# Altium PCB flatsat_2_PCB.PcbDoc (part 4 of 6)
Units mil, origin at the board's own origin, x right, y up, seen from the top; angles counter-clockwise.
Board outline 15748.03 x 9842.52 mil, 4 copper layers (Top Layer, FlatSat GND, FlatSat VCC, Bottom Layer), stack 82.765 mil thick; 155 components, 191 nets, 1391 pads, 1634 vias.
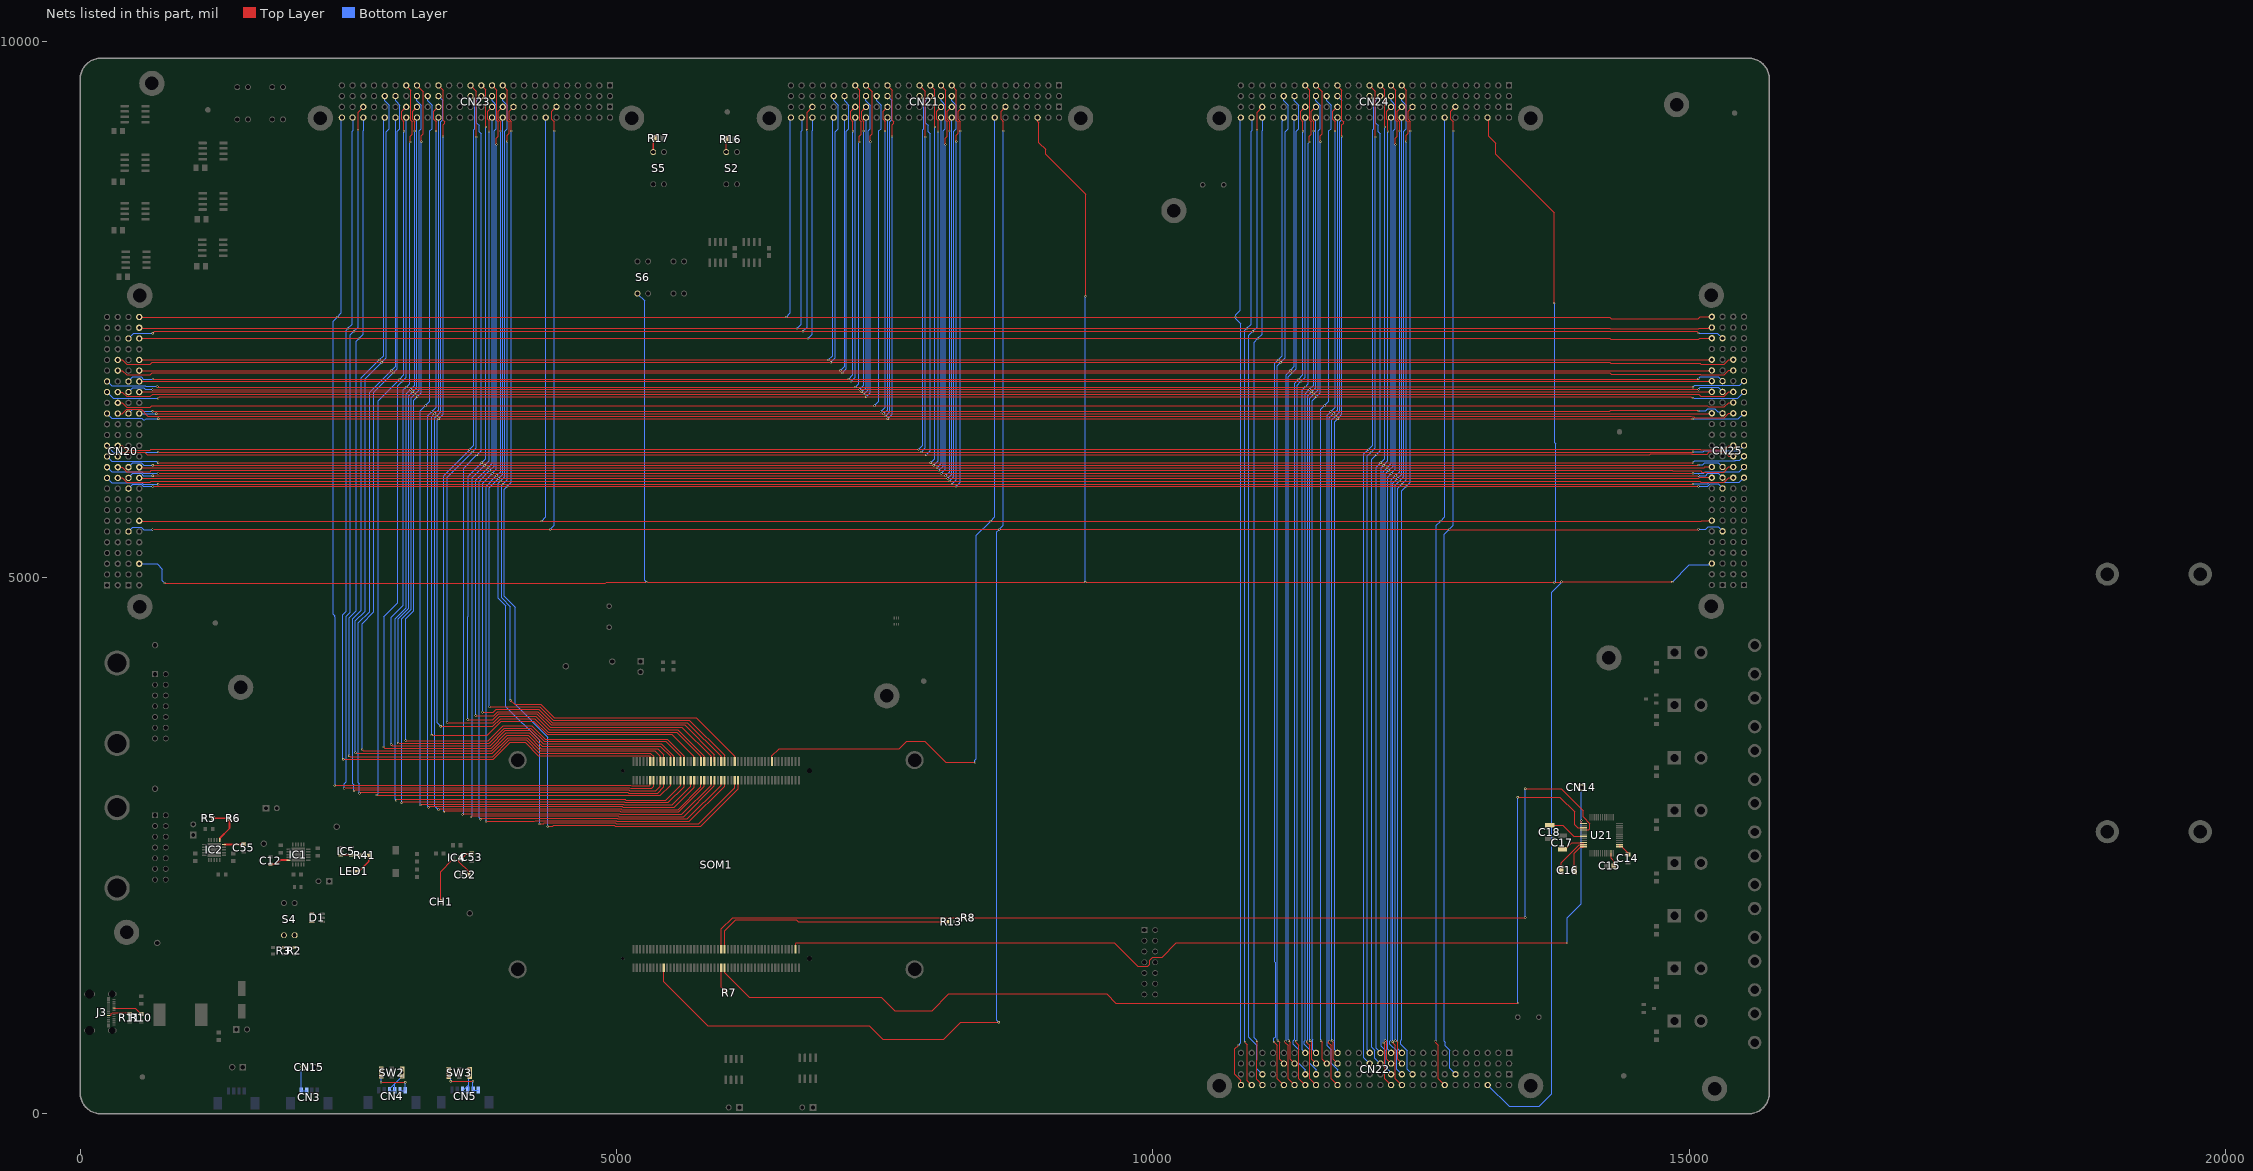
[diagram p5: the nets of this part, all layers, seen from the top]

## Via types
v1: diameter 20, hole 11.81, Top Layer to Bottom Layer, tented both sides, 872 vias
v2: diameter 30, hole 15, Top Layer to Bottom Layer, 690 vias
v3: diameter 30, hole 17.72, Top Layer to Bottom Layer, tented both sides, 72 vias

## Nets (pads, with @x,y where several pads share a name; then routed paths per layer and width w, separated by ;. In a path a pad name is that pad's centre, name@x,y a point inside that pad or via, vN(x,y) a via of type N, cw(c..) or ccw(c..) an arc to the next point about the centre after c; other vN are vias at no path point) (continued)
H2_P: CN20.58 CN21.58 CN22.58 CN24.58 CN25.58 S6.1 | length 32268.2
  Top Layer w8: v1(787.4,4949.26) 2866.44,4949.26 2869.41,4946.28 4895.99,4946.28 4907.08,4957.37 v1(5281.03,4957.37) v1(9370.08,4957.37) 9370.98,4956.47 13741.45,4956.47 v1(13742.36,4955.56) 13800.74,4955.56 13805.81,4960.63 v1(13809.06,4960.63) 13810.68,4959 14840.25,4959 v1(14841.88,4957.37) ; CN21.58@8925.98,9288.19 8927.79,9286.39 8927.79,9251.35 8937.01,9242.13 8937.01,9055.12 9000.33,8991.8 9000.33,8948.66 9011.98,8937.01 9373.57,8575.42 v1(9373.57,7622.05) ; CN24.58@13120.47,9288.19 13129.92,9278.74 13129.92,9114.17 13194.82,9049.28 13194.82,8948.66 13740.16,8403.32 v1(13740.16,7559.06)
  Bottom Layer w7.99: CN22.58@13121.59,269.42 13321.08,69.93 13603.39,69.93 13641.73,108.27
  Bottom Layer w8: CN20.58@551.18,5129.13 717.32,5129.13 767.72,5078.74 767.72,4969.63 787.4,4949.94 v1(787.4,4949.26) ; S6.1@5195.28,7647.64 5261.59,7581.32 5261.59,4976.81 v1(5281.03,4957.37) ; v1(9370.08,4957.37) 9371.83,4959.12 9371.83,7620.3 v1(9373.57,7622.05) ; 13641.73,108.27 13641.73,109.64 13718.79,186.7 13718.79,4861.88 13806.76,4949.85 13806.76,4958.33 v1(13809.06,4960.63) ; v1(13740.16,7559.06) 13740.16,7555.81 13745.16,7550.81 13745.16,6257.49 13756.16,6246.49 13756.16,4966.25 13745.47,4955.56 v1(13742.36,4955.56) ; v1(14841.88,4957.37) 15002.62,5118.11 15184.23,5118.11 15197.41,5131.3 CN25.58@15211.23,5131.3
LTC_ITR: CN14.1 SOM1.JX2-97 U21.37 | length 8989.9
  Top Layer w7.99: SOM1.JX2-97@6669.29,1535.43 6669.29,1586.61 6677.17,1594.49 9641.73,1594.49 9860.02,1376.2 9905.53,1376.2 9936.99,1376.2 9951,1376.2 9972.44,1397.64 9972.44,1433.07 10000,1460.63 10086.61,1460.63 10220.47,1594.49 v1(13862.2,1594.49) ; U21.37@13993.35,2706.69 13994.15,2706.69 13996.06,2708.6 v1(13996.06,2736.22)
  Bottom Layer w7.99: CN14.1@13992.13,3047.24 CN14.1@13996.06,3043.31 v1(13996.06,2736.22)
  Bottom Layer w8: v1(13862.2,1594.49) 13862.2,1826.77 13996.06,1960.63 v1(13996.06,2736.22)
MISO_CHN_1: CN20.37 CN21.37 CN22.37 CN23.37 CN24.37 CN25.37 SOM1.JX1-31 | length 36391.1
  Top Layer w8: v1(727.5,6670.61) 742.14,6685.25 v1(3141.9,6685.25) v1(7327.72,6685.25) v1(11522.21,6685.25) 15015.02,6685.25 15027.5,6672.77 v1(15034.91,6672.77) v1@15032.75,6670.61 ; v1(3035.43,3480.32) 3036.76,3478.99 3421.45,3478.99 3423.23,3477.2 3804.67,3477.2 3946.35,3618.88 4211.91,3618.88 4336.8,3494 5472.54,3494 5629.92,3336.61 SOM1.JX1-31@5629.92,3285.43 ; CN23.37@3140.16,9588.19 3198.69,9529.66 3198.69,9136.34 3181.27,9118.92 v1(3181.27,9062.82) ; CN21.37@7325.98,9588.19 7384.51,9529.66 7384.51,9136.34 7367.09,9118.92 v1(7367.09,9062.82) ; CN24.37@11520.47,9588.19 11579,9529.66 11579,9136.34 11561.58,9118.92 v1(11561.58,9062.82)
  Bottom Layer w8: CN20.37@251.18,6729.13 309.71,6670.61 v1(727.5,6670.61) ; v1(3035.43,3480.32) 3035.43,4618.11 3110.24,4692.91 3110.24,6653.59 v1(3141.9,6685.25) 3181.27,6724.62 v1(3181.27,9062.82) ; v1(7327.72,6685.25) 7367.09,6724.62 v1(7367.09,9062.82) ; CN22.37@11521.59,569.42 11490.75,600.26 11490.75,691.2 11487.2,694.75 11487.2,1417.32 11487.2,6650.23 v1(11522.21,6685.25) 11561.58,6724.62 v1(11561.58,9062.82) ; v1(15034.91,6672.77) 15452.7,6672.77 CN25.37@15511.23,6731.3
MISO_CHN_2: CN20.66 CN21.66 CN22.66 CN23.66 CN24.66 CN25.66 SOM1.JX1-83 | length 35698.8
  Top Layer w8: CN20.66@551.18,5529.13 553.11,5527.2 v1(4302.72,5527.2) v1(8488.54,5527.2) v1(12683.03,5527.2) 15113.82,5527.2 15118.7,5532.08 15210.44,5532.08 CN25.66@15211.23,5531.3 ; SOM1.JX1-83@6448.82,3285.43 6448.82,3338.58 6515.75,3405.51 7637.8,3405.51 7706.69,3474.41 7874.02,3474.41 8070.87,3277.56 v1(8343.84,3277.56) ; v1(12636.11,678.55) 12636.11,664.13 12662.12,638.12 12662.12,328.88 CN22.66@12721.59,269.42
  Bottom Layer w8: v1(4302.72,5527.2) 4342.09,5566.57 CN23.66@4342.09,9286.26 ; v1(8343.84,3277.56) 8342.2,3279.2 8342.2,3299.3 8354.33,3311.43 8354.33,5392.99 v1(8488.54,5527.2) 8527.91,5566.57 CN21.66@8527.91,9286.26 ; v1(12636.11,678.55) 12636.11,681.59 12643.76,689.24 12643.76,5487.93 v1(12683.03,5527.2) 12722.4,5566.57 CN24.66@12722.4,9286.26
MISO_CHN_3: SOM1.JX2-56 U21.39 | length 10412.6
  Top Layer w7.99: 9655.51,1033.46 v1(13405.51,1033.46) ; v1@13403.54,2952.76 13795.28,2952.76 13933.07,2814.96 13933.07,2696.85 13962.6,2667.32 U21.39@14015.75,2667.32
  Top Layer w8: SOM1.JX2-56@6007.87,1362.2 6007.87,1314.7 6236.2,1086.37 7467.84,1086.37 7593.19,961.02 7942.3,961.02 8099.78,1118.5 9570.47,1118.5 9655.51,1033.46
  Bottom Layer w7.99: v1(13401.57,2952.76) 13403.54,2950.79 13403.54,1035.43 v1(13405.51,1033.46)
MOSI_CHN_1: CN20.39 CN21.39 CN22.39 CN23.39 CN24.39 CN25.39 SOM1.JX1-25 | length 36342.7
  Top Layer w8: v1(718.5,6781.5) 721.75,6781.5 727.53,6775.72 v1(3039.73,6775.72) v1(7225.56,6775.72) v1(11420.05,6775.72) 11422.34,6778.01 11428.94,6778.01 11430.73,6779.81 15027.04,6779.81 15031.91,6774.93 v1(15035.16,6774.93) ; v1(2900.59,3442.97) 2901.25,3442.97 2911.28,3432.95 3822.67,3432.95 3964.58,3574.87 4193.68,3574.87 4318.57,3449.98 5418.13,3449.98 5535.36,3332.75 5535.36,3285.5 SOM1.JX1-25@5535.43,3285.43 ; CN23.39@3040.16,9588.19 3083.07,9545.28 3083.07,9264.54 3096.52,9251.09 3096.52,9133.18 3079.1,9115.76 v1(3079.1,9059.66) ; CN21.39@7225.98,9588.19 7268.9,9545.28 7268.9,9264.54 7282.35,9251.09 7282.35,9133.18 7264.93,9115.76 v1(7264.93,9059.66) ; CN24.39@11420.47,9588.19 11463.39,9545.28 11463.39,9264.54 11476.84,9251.09 11476.84,9133.18 11459.42,9115.76 v1(11459.42,9059.66)
  Bottom Layer w8: CN20.39@251.18,6829.13 294.09,6786.22 605.51,6786.22 610.24,6781.5 v1(718.5,6781.5) ; v1(2900.59,3442.97) 2900.59,4628.94 3013.96,4742.3 3013.96,6749.94 v1(3039.73,6775.72) 3070.87,6806.85 3070.87,9048.97 3079.1,9057.21 v1(3079.1,9059.66) ; v1(7225.56,6775.72) 7256.69,6806.85 7256.69,9048.97 7264.93,9057.21 v1(7264.93,9059.66) ; 11411.81,6767.48 11390.88,6746.55 11390.88,1417.32 11390.88,691.64 11390.59,691.36 11390.75,691.2 11390.75,600.26 CN22.39@11421.59,569.42 ; v1(11420.05,6775.72) 11451.18,6806.85 11451.18,9048.97 11459.42,9057.21 v1(11459.42,9059.66) ; v1(15035.16,6774.93) 15050.99,6790.76 15428.02,6790.76 15428.55,6791.29 15471.22,6791.29 CN25.39@15511.23,6831.3
MOSI_CHN_2: CN20.63 CN21.63 CN22.63 CN23.63 CN24.63 CN25.63 SOM1.JX2-20 | length 40153.4
  Top Layer w8: v1(676.09,5447.85) 677.75,5449.51 v1(4382.07,5449.51) v1(8567.9,5449.51) v1(12762.38,5449.51) 12764.2,5447.69 15076.76,5447.69 15076.95,5447.88 15085.15,5447.88 v1(15087.45,5450.18) ; v1@4421.51,9163.35 4421.51,9248.37 4398.82,9271.07 4398.82,9347.05 CN23.63@4440.16,9388.39 ; SOM1.JX2-20@5440.94,1362.2 5440.94,1232.29 5849.71,823.52 7357.21,823.52 7483.8,696.93 8051.69,696.93 8209.17,854.41 v1(8563.68,854.41) ; v1@8607.34,9163.35 8607.34,9248.37 8584.65,9271.07 8584.65,9347.05 CN21.63@8625.98,9388.39 ; v1@12801.83,9163.35 12801.83,9248.37 12779.13,9271.07 12779.13,9347.05 CN24.63@12820.47,9388.39
  Bottom Layer w8: CN20.63@450.98,5429.13 492.32,5470.47 568.3,5470.47 591,5447.78 676.02,5447.78 v1(676.09,5447.85) ; v1(4382.07,5449.51) 4421.44,5488.88 v1(4421.44,9163.28) v1@4421.51,9163.35 ; v1(8563.68,854.41) 8563.68,856.53 8547.24,872.97 8547.24,5425.61 8567.9,5446.26 v1(8567.9,5449.51) 8607.27,5488.88 v1(8607.27,9163.28) ; v1(12801.75,9163.28) 12801.75,5488.88 v1(12762.38,5449.51) 12716.54,5403.66 12716.54,676.9 12726.11,667.33 12726.11,634.3 12765.75,594.66 12765.75,425.45 CN22.63@12821.59,369.61 ; v1(15087.45,5450.18) 15154.9,5450.18 15177.36,5472.63 15270.09,5472.63 CN25.63@15311.42,5431.3
MOSI_CHN_3: R8.2 U21.40 | length 7218.6
  Top Layer w7.99: 9645.67,1830.71 v1(13472.44,1830.71) ; v1(13472.44,3031.5) 13807.09,3031.5 14011.81,2826.77 14011.81,2769.69 14074.8,2706.69 14074.8,2657.48 14065.82,2648.49 U21.40@14045.65,2648.49
  Top Layer w8: R8.2@8307.09,1830.71 R8.2@8307.56,1830.71 9645.67,1830.71
  Bottom Layer w8: v1(13472.44,1830.71) v1(13472.44,3031.5)
NC_KILL_SWITCH_1: CN4.1 CN4.2 SW2.1 | length 490.2
  Top Layer w10.98: v1(2805.12,295.28) v1(3031.5,295.28)
  Top Layer w15: SW2.1@2807.64,351.27 SW2.1@2807.64,385.72
  Bottom Layer w10.98: v1(2805.12,295.28) 2805.12,335.24 2809.71,339.84 2814.96,339.84 2820.07,344.95 2799.46,385.72 SW2.1@2807.64,385.72 ; CN4.2@2980.32,216.54 CN4.1@3023.09,216.54
  Bottom Layer w11: CN4.1@3031.5,221.46 v1(3031.5,295.28)
NC_KILL_SWITCH_2: CN5.1 CN5.2 SW3.1 | length 426
  Top Layer w10.98: v1(3454.97,304.87) v1@3661.17,304.87
  Top Layer w15: v1@3661.17,304.87 v1@3661.42,305.12
  Bottom Layer w10.98: SW3.1@3435.04,383.86 3435.04,351.93 3454.97,332 v1(3454.97,304.87)
  Bottom Layer w11: v1(3661.42,304.63) 3662.4,303.64 3662.4,223.43 CN5.2@3663.39,222.44 CN5.1@3712.6,222.44
NetC12_1: C12.1 IC1.15 | length 182.9
  Top Layer w15: C12.1@1775.59,2327.2 1831.14,2327.2 1871.06,2367.13 IC1.15@1941.93,2367.13
NetC14_1: C14.1 U21.13 U21.14 | length 142.3
  Top Layer w8: U21.13@14350.39,2490.16 14355.6,2490.16 14357.5,2492.06 14357.5,2507.94 14355.6,2509.84 U21.14@14350.39,2509.84 ; U21.13@14375.98,2490.16 14377.89,2488.25 14429.13,2437.01 C14.1@14429.13,2418.31 C14.1@14429.13,2401.57
NetC15_1: C15.1 U21.11 | length 119.3
  Top Layer w8: U21.11@14271.65,2431.1 14271.65,2381.89 14298.23,2355.31 C15.1@14298.23,2322.83
NetC16_1: C16.1 U21.48 | length 270.5
  Top Layer w8: C16.1@13927.17,2273.62 13927.17,2431.1 13984.32,2488.25 14013.84,2488.25 U21.48@14015.75,2490.16
NetC16_2: C16.2 U21.47 | length 354.7
  Top Layer w8: C16.2@13809.06,2263.78 13809.06,2342.52 13974.47,2507.94 14013.84,2507.94 U21.47@14015.75,2509.84
NetC17_1: C17.1 U21.46 | length 288.5
  Top Layer w7.99: C17.1@13824.56,2458.66 13789.37,2466.54 C17.1@13818.9,2466.54 13836.56,2484.19 13862.15,2484.19 13907.48,2529.53 U21.46@14015.75,2529.53
NetC18_1: C18.1 U21.43 | length 347.5
  Top Layer w8: C18.1@13710.63,2690.94 13820.87,2690.94 13923.23,2588.58 U21.43@14015.75,2588.58
NetC52_1: C52.1 IC4.1 | length 175.9
  Top Layer w9.84: IC4.1@3531.5,2367.68 3531.5,2352.36 3623.58,2260.28 C52.1@3623.58,2229.88
NetC53_1: C53.1 IC4.2 | length 134.4
  Top Layer w9.84: IC4.2@3533.46,2387.36 3568.46,2387.36 3604.74,2423.64 3648.48,2423.64 C53.1@3651.57,2426.73
NetC55_2: C55.2 IC2.15 | length 184.5
  Top Layer w15: IC2.15@1342.52,2511.81 1522.09,2511.81 C55.2@1525.59,2515.32
NetCH1_1: CH1.1 IC4.6 | length 440.6
  Top Layer w9.84: CH1.1@3361.67,1988.19 3361.67,1994.09 3361.67,2259.31 3470.04,2367.68 IC4.6@3486.22,2367.68
NetCN3_3: CN3.3 CN3.4 CN15.2 | length 280.4
  Bottom Layer w11: CN15.2@2085.14,436.22 2085.14,422.96 2062.01,399.83 CN3.4@2062.01,214.57 CN3.3@2111.22,214.57
NetD1_4: D1.4 R3.1 S4.3 | length 0.6
  Top Layer w15: R3.1@1897.24,1550.08 R3.1@1897.64,1549.68
NetD1_5: D1.5 R2.1 S4.4 | length 0.6
  Top Layer w15: R2.1@1996.06,1549.68 R2.1@1996.46,1550.08
NetIC2_16: IC2.16 R5.2 R6.1 | length 387
  Top Layer w15: R5.2@1235.79,2755.91 R6.1@1392.17,2755.91 ; IC2.16@1301.18,2553.15 1301.18,2570.87 1392.17,2661.85 R6.1@1392.17,2746.06
NetIC5_3: IC5.3 IC5.4 R41.1 | length 190.8
  Top Layer w15: IC5.3@2429.72,2412.4 IC5.4@2528.54,2412.4 2529.53,2411.42 2618.74,2411.42 R41.1@2619.72,2410.43
NetJ3_A5: J3.A5 R10.1 | length 276.5
  Top Layer w7.99: J3.A5@315.75,987.01 336.27,987.01 512.56,987.01 R10.1@568.9,930.67
NetJ3_B5: J3.B5 R11.1 | length 220.4
  Top Layer w7.99: J3.B5@264.57,918.11 265.43,918.98 284.79,918.98 290.13,924.31 290.13,937.58 297.43,944.88 442.24,944.88 ; 442.67,944.45 453.19,944.45 R11.1@462.6,935.04
NetLED1_2: LED1.2 R41.2 | length 196.8
  Top Layer w15: LED1.2@2587.8,2262.8 2599.61,2262.8 2689.72,2352.91 R41.2@2689.72,2410.43
NetR7_2: R7.2 SOM1.JX2-54 | length 249.7
  Top Layer w7.99: SOM1.JX2-54@5976.38,1362.2 5976.38,1182.6 6023.15,1135.83 R7.2@6023.15,1131.89
NetR8_1: R8.1 SOM1.JX2-53 | length 2504.2
  Top Layer w7.99: SOM1.JX2-53@5976.38,1535.43 5976.38,1724.41 6082.68,1830.71 R8.1@8247.56,1830.71
NetR13_1: R13.1 SOM1.JX2-55 | length 2302.7
  Top Layer w8: SOM1.JX2-55@6007.87,1535.43 6007.87,1706.69 6109.59,1808.41 6675.84,1808.41 6692.91,1791.34 R13.1@8090.08,1791.34
NetR16_2: R16.2 S2.4 | length 118.4
  Top Layer w8: R16.2@6022.99,9084.65 6023.62,9084.02 S2.4@6023.62,8966.54
NetR17_2: R17.2 S5.4 | length 132.4
  Top Layer w8: R17.2@5342.91,9083.7 R17.2@5353.7,9094.49
  Top Layer w15: S5.4@5342.91,8966.54 R17.2@5342.91,9083.7
NO_KILL_SWITCH_1: CN4.3 CN4.4 SW2.3 | length 264.9
  Bottom Layer w10.98: CN4.4@2883.86,214.68 CN4.3@2926.64,214.68 ; CN4.4@2886.92,234.36 2933.07,280.51 ; CN4.3@2933.07,221.11 2933.07,280.51 ; SW2.3@3001.97,349.41 2933.07,280.51
NO_KILL_SWITCH_2: CN5.3 CN5.4 SW3.3 | length 241.3
  Bottom Layer w10.98: CN5.4@3572.83,204.84 CN5.3@3615.61,204.84 ; CN5.4@3575.9,224.52 3622.05,270.67 ; CN5.3@3622.05,211.27 3622.05,270.67 ; SW3.3@3622.05,344.49 3622.05,270.67
P1: CN20.104 CN21.104 CN22.104 CN23.104 CN24.104 CN25.104 SOM1.JX1-12 | length 34920.6
  Top Layer w8: CN20.104@551.18,7429.13 1479.82,7429.13 1484.17,7424.78 2389.22,7424.78 2393.58,7429.13 v1(2396.83,7429.13) v1(6582.65,7429.13) v1(10771.65,7429.13) 14259.15,7429.13 14273.35,7414.94 15085.14,7414.94 15101.5,7431.3 CN25.104@15211.23,7431.3 ; v1(2374.02,3062.99) 2375.73,3064.7 5134.46,3064.7 5141.47,3057.7 5307.95,3057.7 5314.96,3064.7 SOM1.JX1-12@5314.96,3112.2 ; v1(10799.21,641.73) 10799.11,641.73 10763.78,606.4 10763.78,369.9 10821.59,312.09 CN22.104@10821.59,269.42
  Bottom Layer w8: v1(2374.02,3062.99) 2374.02,4633.03 2374.02,4643.56 2357.46,4660.12 2357.46,7389.76 v1(2396.83,7429.13) 2436.2,7468.5 2436.2,9284.23 CN23.104@2440.16,9288.19 ; v1(6582.65,7429.13) 6622.02,7468.5 6622.02,9284.23 CN21.104@6625.98,9288.19 ; v1(10799.21,641.73) 10819.64,662.16 10819.64,7365.4 10771.65,7413.39 v1(10771.65,7429.13) 10771.65,7448.82 10816.51,7493.68 10816.51,9284.23 CN24.104@10820.47,9288.19
P2: CN20.102 CN21.102 CN22.102 CN23.102 CN24.102 CN25.102 SOM1.JX1-11 | length 34784.8
  Top Layer w8: CN20.102@551.18,7329.13 557.35,7322.97 v1(2497.13,7322.97) v1(6682.96,7322.97) v1(10877.44,7322.97) 14259.15,7322.97 14263.85,7318.27 15087.64,7318.27 15095.73,7326.35 15206.29,7326.35 CN25.102@15211.23,7331.3 ; v1(2452.76,3307.09) 3852.42,3307.09 4010.16,3464.83 4148.1,3464.83 4272.99,3339.94 5307.95,3339.94 5314.96,3332.93 SOM1.JX1-11@5314.96,3285.43 ; v1(10858.27,669.29) 10881.05,646.51 10881.05,311.38 10921.59,270.84 CN22.102@10921.59,269.42
  Bottom Layer w8: v1@2452.89,3307.22 2450.46,3309.65 2450.46,3317.77 2450.46,4655.18 2480.32,4685.04 2480.32,7306.15 v1(2497.13,7322.97) 2536.5,7362.34 2536.5,9162.93 2545.1,9171.53 2545.1,9283.25 CN23.102@2540.16,9288.19 ; v1(6682.96,7322.97) 6722.33,7362.34 6722.33,9162.93 6730.93,9171.53 6730.93,9283.25 CN21.102@6725.98,9288.19 ; v1(10858.27,669.29) 10858.27,7303.79 v1(10877.44,7322.97) 10916.81,7362.34 10916.81,9162.93 10925.41,9171.53 10925.41,9283.25 CN24.102@10920.47,9288.19
P3: CN20.99 CN21.99 CN22.99 CN23.99 CN24.99 CN25.99 SOM1.JX1-14 | length 35557.5
  Top Layer w8: v1(676.84,7277.84) 695.19,7296.18 v1(2552.09,7296.18) v1(6737.91,7296.18) v1(10932.4,7296.18) 15069.39,7296.18 15084.49,7281.08 15084.49,7278.92 v1(15085.57,7280) ; v1(2461.32,3033.19) 2462.5,3033.19 2472.01,3042.7 5125.35,3042.7 5132.36,3035.69 5329,3035.69 5346.46,3053.15 SOM1.JX1-14@5346.46,3112.2 ; v1(2591.46,9171.24) 2591.46,9339.49 CN23.99@2640.16,9388.19 ; v1(6777.28,9171.24) 6777.28,9339.49 CN21.99@6825.98,9388.19 ; v1(10971.77,9171.24) 10971.77,9339.49 CN24.99@11020.47,9388.19
  Bottom Layer w8: CN20.99@451.18,7229.13 499.88,7277.84 v1(676.84,7277.84) ; v1(2461.32,3033.19) 2461.32,3079.43 2480.32,3098.43 2480.32,4637.8 2519.68,4677.17 2519.68,7263.78 v1(2552.09,7296.18) 2591.45,7335.55 v1(2591.46,9171.24) ; v1(6737.91,7296.18) 6777.28,7335.55 v1(6777.28,9171.24) ; v1(10971.77,9171.24) 10971.77,7335.55 v1(10932.4,7296.18) 10893.03,7256.81 10893.03,1417.32 10893.03,715.41 10967.88,640.56 10967.88,423.12 CN22.99@11021.59,369.42 ; v1(15085.57,7280) 15262.53,7280 CN25.99@15311.23,7231.3
P4: CN20.100 CN21.100 CN22.100 CN23.100 CN24.100 CN25.100 SOM1.JX1-13 | length 34864.4
  Top Layer w8: CN20.100@551.18,7229.13 v1(2600.01,7229.13) v1(6785.84,7229.13) v1(10980.32,7229.13) 14259.15,7229.13 14267.41,7220.87 15089.5,7220.87 15097.76,7229.13 15209.07,7229.13 CN25.100@15211.23,7231.3 ; v1(2507.87,3338.58) 2510.69,3338.58 2518.56,3330.71 3844.92,3330.71 4001.05,3486.83 4157.22,3486.83 4282.11,3361.95 5317.07,3361.95 5346.08,3332.93 5346.46,3332.93 SOM1.JX1-13@5346.46,3285.43 ; v1(10972.44,681.1) 10972.44,503.21 10967.44,498.21 10967.44,323.56 CN22.100@11021.59,269.42
  Bottom Layer w8: v1(2507.87,3338.58) 2507.87,4625.98 2573.06,4691.17 2573.06,7202.18 v1(2600.01,7229.13) 2639.38,7268.5 2639.38,9165.81 2645.1,9171.53 2645.1,9283.25 CN23.100@2640.16,9288.19 ; v1(6785.84,7229.13) 6825.21,7268.5 6825.21,9165.81 6830.93,9171.53 6830.93,9283.25 CN21.100@6825.98,9288.19 ; v1(10972.44,681.1) 10944.31,709.23 10944.31,1417.32 10944.31,7193.12 v1(10980.32,7229.13) 11019.69,7268.5 11019.69,9165.81 11025.41,9171.53 11025.41,9283.25 CN24.100@11020.47,9288.19
P5: CN20.96 CN21.96 CN22.96 CN23.96 CN24.96 CN25.96 SOM1.JX1-18 | length 35383.7
  Top Layer w8: CN20.96@551.18,7029.13 v1(2788.98,7029.13) v1(6974.81,7029.13) v1(11169.3,7029.13) 15209.07,7029.13 CN25.96@15211.23,7031.3 ; v1@2553.42,3012.14 2554.59,3012.14 2563.15,3020.69 5116.23,3020.69 5123.24,3013.68 5366.04,3013.68 5409.45,3057.09 SOM1.JX1-18@5409.45,3112.2 ; v1(11129.56,670.69) 11162.12,638.12 11162.12,328.88 CN22.96@11221.59,269.42
  Top Layer w15: v1(2552.46,3011.18) v1@2553.42,3012.14
  Bottom Layer w8: v1(2552.46,3011.18) 2552.46,3067.14 2539.37,3080.23 2539.37,4614.17 2620.77,4695.57 2620.77,6860.92 v1(2788.98,7029.13) 2828.35,7068.5 2828.35,9257.98 2830.39,9260.01 2830.39,9278.42 CN23.96@2840.16,9288.19 ; v1(6974.81,7029.13) 7014.18,7068.5 7014.18,9257.98 7016.22,9260.01 7016.22,9278.42 CN21.96@7025.98,9288.19 ; v1(11129.56,670.69) 11129.56,706.33 11143.6,720.37 11143.6,1412.52 11138.8,1417.32 11138.8,6998.63 v1(11169.3,7029.13) 11208.67,7068.5 11208.67,9257.98 11210.7,9260.01 11210.7,9278.42 CN24.96@11220.47,9288.19
P6: CN20.44 CN21.44 CN22.44 CN23.44 CN24.44 CN25.44 SOM1.JX1-17 | length 36030.5
  Top Layer w8: CN20.44@351.18,7029.13 393.86,7029.13 434.39,6988.6 653.68,6988.6 672.96,7007.87 v1(2812.47,7007.87) v1(6998.29,7007.87) v1(11192.78,7007.87) 14259.15,7007.87 14269.48,6997.55 15101.94,6997.55 15108.72,6990.76 15328.02,6990.76 15368.55,7031.3 CN25.44@15411.23,7031.3 ; v1(2566.93,3367.46) 2570.18,3367.46 2576.92,3360.72 3843.81,3360.72 3991.93,3508.84 4166.34,3508.84 4291.22,3383.96 5358.43,3383.96 5409.45,3332.93 SOM1.JX1-17@5409.45,3285.43 ; v1(11167.91,682.41) 11181.05,669.27 11181.05,549.03 11181.1,548.98 11181.1,511.81 11221.59,471.33 CN22.44@11221.59,469.42
  Bottom Layer w8: v1(2566.93,3367.46) 2566.93,4598.43 2656.82,4688.31 2656.82,6852.22 v1(2812.47,7007.87) 2851.84,7047.24 2851.84,9156.83 2880.69,9185.69 2880.69,9404.98 2840.16,9445.51 CN23.44@2840.16,9488.19 ; v1(6998.29,7007.87) 7037.66,7047.24 7037.66,9156.83 7066.52,9185.69 7066.52,9404.98 7025.98,9445.51 CN21.44@7025.98,9488.19 ; v1(11167.91,682.41) 11161.17,689.15 11161.17,1417.32 11161.17,6976.26 v1(11192.78,7007.87) 11232.15,7047.24 11232.15,9156.83 11261.01,9185.69 11261.01,9404.98 11220.47,9445.51 CN24.44@11220.47,9488.19
P7: CN20.94 CN21.94 CN22.94 CN23.94 CN24.94 CN25.94 SOM1.JX1-20 | length 35501.6
  Top Layer w8: CN20.94@551.18,6929.13 v1(2900.79,6929.13) v1(7086.61,6929.13) v1(11281.1,6929.13) 15209.07,6929.13 CN25.94@15211.23,6931.3 ; v1(2603.64,2989.71) 2605.36,2989.71 2614.33,2998.68 5107.12,2998.68 5114.12,2991.67 5383.41,2991.67 5440.94,3049.21 SOM1.JX1-20@5440.94,3112.2 ; v1(11236.11,678.55) 11236.11,664.13 11262.12,638.12 11262.12,328.88 CN22.94@11321.59,269.42
  Bottom Layer w8: v1(2603.64,2989.71) 2603.64,3077.46 2594.49,3086.61 2594.49,4578.74 2699.51,4683.76 2699.51,6727.86 v1(2900.79,6929.13) 2940.16,6968.5 CN23.94@2940.16,9288.19 ; v1(7086.61,6929.13) 7125.98,6968.5 CN21.94@7125.98,9288.19 ; v1(11236.11,678.55) 11244.7,687.14 11244.7,1417.32 11244.7,6892.73 v1(11281.1,6929.13) 11320.47,6968.5 CN24.94@11320.47,9288.19
P8: CN20.42 CN21.42 CN22.42 CN23.42 CN24.42 CN25.42 SOM1.JX1-19 | length 36098.5
  Top Layer w8: CN20.42@351.18,6929.13 393.86,6929.13 434.39,6888.6 653.68,6888.6 672.96,6907.87 v1(2918.58,6907.87) v1(7104.41,6907.87) v1(11298.89,6907.87) 14259.15,6907.87 14271.58,6895.45 15104.04,6895.45 15108.72,6890.76 15328.02,6890.76 15368.55,6931.3 CN25.42@15411.23,6931.3 ; v1(2629.23,3398.96) 2629.23,3397.37 2639.92,3386.68 3838.65,3386.68 3982.82,3530.85 4175.45,3530.85 4300.34,3405.96 5383.41,3405.96 5440.94,3348.43 SOM1.JX1-19@5440.94,3285.43 ; v1(11267.91,682.41) 11281.05,669.27 11281.05,549.03 11281.1,548.98 11281.1,511.81 11321.59,471.33 CN22.42@11321.59,469.42
  Bottom Layer w8: v1(2629.23,3398.96) 2629.23,4570.18 2738.88,4679.82 2738.88,6728.17 v1(2918.58,6907.87) 2957.95,6947.24 2957.95,9162.94 2980.69,9185.69 2980.69,9404.98 2940.16,9445.51 CN23.42@2940.16,9488.19 ; v1(7104.41,6907.87) 7143.78,6947.24 7143.78,9162.94 7166.52,9185.69 7166.52,9404.98 7125.98,9445.51 CN21.42@7125.98,9488.19 ; v1(11267.91,682.41) 11265.62,684.7 11265.62,691.7 11264.23,693.09 11264.23,1417.32 11264.23,6873.21 v1(11298.89,6907.87) 11338.26,6947.24 11338.26,9162.94 11361.01,9185.69 11361.01,9404.98 11320.47,9445.51 CN24.42@11320.47,9488.19
P9: CN20.91 CN21.91 CN22.91 CN23.91 CN24.91 CN25.91 SOM1.JX1-24 | length 35990.3
  Top Layer w8: v1(678.27,6850.3) v1(2979.63,6850.3) v1(7165.45,6850.3) v1(11359.94,6850.3) 15081.98,6850.3 v1(15084.14,6852.46) ; v1(2765.75,2972.44) 5102.23,2972.44 5105.01,2969.67 5408.9,2969.67 5503.94,3064.7 SOM1.JX1-24@5503.94,3112.2 ; v1(3019,9161.1) 3019,9250.89 2998.82,9271.07 2998.82,9346.85 CN23.91@3040.16,9388.19 ; v1(7204.82,9161.1) 7204.82,9250.89 7184.65,9271.07 7184.65,9346.85 CN21.91@7225.98,9388.19 ; v1(11399.31,9161.1) 11399.31,9250.89 11379.13,9271.07 11379.13,9346.85 CN24.91@11420.47,9388.19
  Bottom Layer w8: CN20.91@451.18,6829.13 492.52,6870.47 568.3,6870.47 588.48,6850.3 v1(678.27,6850.3) ; v1(2765.75,2972.44) 2765.75,2973.28 2778.25,2985.79 2778.25,6648.92 v1(2979.63,6850.3) 3019,6889.67 v1(3019,9161.1) ; v1(7165.45,6850.3) 7204.82,6889.67 v1(7204.82,9161.1) ; v1(11399.31,9161.1) 11399.31,6889.67 v1(11359.94,6850.3) 11323.54,6813.89 11323.54,1417.32 11323.54,695.69 11310.5,682.65 11310.5,649.9 11362.12,598.28 11362.12,471.56 11421.59,412.09 CN22.91@11421.59,369.42 ; v1(15084.14,6852.46) 15103.51,6871.83 15270.69,6871.83 CN25.91@15311.23,6831.3
P10: CN20.92 CN21.92 CN22.92 CN23.92 CN24.92 CN25.92 SOM1.JX1-23 | length 35056.2
  Top Layer w8: CN20.92@551.18,6829.13 v1(3000.79,6829.13) v1(7186.61,6829.13) v1(11381.1,6829.13) 15209.07,6829.13 CN25.92@15211.23,6831.3 ; v1@2830.45,3420.96 2840.72,3410.7 3831.54,3410.7 3973.7,3552.86 4184.57,3552.86 4309.45,3427.97 5408.9,3427.97 5503.94,3332.93 SOM1.JX1-23@5503.94,3285.43 ; v1(11336.11,678.55) 11336.11,664.13 11362.12,638.12 11362.12,328.88 CN22.92@11421.59,269.42
  Top Layer w15: v1(2829.43,3420.96) v1@2830.45,3420.96
  Bottom Layer w8: v1(2829.43,3420.96) 2829.43,4633.03 2962.07,4765.67 2962.07,6790.42 v1(3000.79,6829.13) 3040.16,6868.5 CN23.92@3040.16,9288.19 ; v1(7186.61,6829.13) 7225.98,6868.5 CN21.92@7225.98,9288.19 ; v1(11336.11,678.55) 11344.7,687.14 11344.7,1417.32 11344.7,6792.73 v1(11381.1,6829.13) 11420.47,6868.5 CN24.92@11420.47,9288.19
P11: CN20.89 CN21.89 CN22.89 CN23.89 CN24.89 CN25.89 SOM1.JX1-30 | length 36048.7
  Top Layer w8: v1(676.34,6753.38) 677.54,6752.18 3078.4,6752.18 v1(3080.04,6753.82) v1(7265.87,6753.82) v1(11460.36,6753.82) 15080.72,6753.82 15081.15,6753.38 v1(15086.07,6753.38) ; v1@2947.51,2923.15 2957.02,2932.66 5079.77,2932.66 5086.78,2925.65 5459.37,2925.65 5598.42,3064.7 SOM1.JX1-30@5598.42,3112.2 ; v1(3119.41,9163.03) 3119.41,9250.47 3098.82,9271.07 3098.82,9346.85 CN23.89@3140.16,9388.19 ; v1(7305.24,9163.03) 7305.24,9250.47 7284.65,9271.07 7284.65,9346.85 CN21.89@7325.98,9388.19 ; v1(11499.73,9163.03) 11499.73,9250.47 11479.13,9271.07 11479.13,9346.85 CN24.89@11520.47,9388.19
  Top Layer w15: v1(2946.16,2923.15) v1@2947.51,2923.15
  Bottom Layer w8: CN20.89@451.18,6729.13 492.52,6770.47 591.73,6770.47 608.83,6753.38 v1(676.34,6753.38) ; v1(2946.16,2923.15) 2946.16,2924.68 2937.01,2933.84 2937.01,4618.11 3039.37,4720.47 3039.37,6713.14 v1(3080.04,6753.82) 3119.41,6793.19 v1(3119.41,9163.03) ; v1(7265.87,6753.82) 7305.24,6793.19 v1(7305.24,9163.03) ; v1(11499.73,9163.03) 11499.73,6793.19 v1(11460.36,6753.82) 11421.23,6714.69 11421.23,688.28 11410.5,677.55 11410.5,649.9 11462.12,598.28 11462.12,471.56 11521.59,412.09 CN22.89@11521.59,369.42 ; v1(15086.07,6753.38) 15105.33,6772.63 15269.89,6772.63 CN25.89@15311.23,6731.3
P12: CN20.90 CN21.90 CN22.90 CN23.90 CN24.90 CN25.90 SOM1.JX1-29 | length 35078
  Top Layer w8: CN20.90@551.18,6729.13 554.42,6732.37 v1(3101.05,6732.37) v1(7286.87,6732.37) v1(11481.36,6732.37) 15210.15,6732.37 CN25.90@15211.23,6731.3 ; v1(2964.57,3456.69) 2966.3,3454.96 3813.55,3454.96 3955.47,3596.87 4202.8,3596.87 4327.69,3471.99 5459.37,3471.99 5598.43,3332.93 SOM1.JX1-29@5598.43,3285.43 ; CN23.90@3140.16,9288.19 CN23.90@3140.42,9287.93 ; CN21.90@7325.98,9288.19 CN21.90@7326.25,9287.93 ; v1(11438.82,676.78) 11436.52,674.49 11436.52,664.54 11436.11,664.13 11462.12,638.12 11462.12,328.88 CN22.90@11521.59,269.42 ; CN24.90@11520.47,9288.19 CN24.90@11520.73,9287.93
  Bottom Layer w8: v1(2964.57,3456.69) 2964.57,4614.17 3062.99,4712.6 3062.99,6694.31 v1(3101.05,6732.37) 3140.42,6771.74 CN23.90@3140.42,9287.93 ; v1(7286.87,6732.37) 7326.24,6771.74 CN21.90@7326.25,9287.93 ; v1(11438.82,676.78) 11438.82,680.03 11441.99,683.21 11441.99,1417.32 11441.99,6693 v1(11481.36,6732.37) 11520.73,6771.74 CN24.90@11520.73,9287.93
P13: CN20.38 CN21.38 CN22.38 CN23.38 CN24.38 CN25.38 SOM1.JX1-32 | length 36473.5
  Top Layer w8: CN20.38@351.18,6729.13 393.86,6729.13 434.39,6688.6 653.68,6688.6 675.45,6710.36 v1(3120.38,6710.36) v1(7306.21,6710.36) v1(11500.7,6710.36) 15089.12,6710.36 15108.72,6690.76 15328.02,6690.76 15368.55,6731.3 CN25.38@15411.23,6731.3 ; v1@2998.69,2901.14 3008.2,2910.65 5070.65,2910.65 5077.66,2903.64 5482.38,2903.64 5629.92,3051.18 SOM1.JX1-32@5629.92,3112.2 ; v1(11467.91,682.41) 11481.05,669.27 11481.05,549.03 11481.1,548.98 11481.1,511.81 11521.59,471.33 CN22.38@11521.59,469.42
  Top Layer w15: v1(2997.34,2901.14) v1@2998.69,2901.14
  Bottom Layer w8: v1(2997.34,2901.14) 2997.34,4615.45 3085.87,4703.98 3085.87,6675.85 v1(3120.38,6710.36) 3159.75,6749.73 3159.76,9164.75 3180.69,9185.69 3180.69,9404.98 3140.16,9445.51 CN23.38@3140.16,9488.19 ; v1(7306.21,6710.36) 7345.58,6749.73 7345.58,9164.75 7366.52,9185.69 7366.52,9404.98 7325.98,9445.51 CN21.38@7325.98,9488.19 ; v1(11467.91,682.41) 11461.33,688.99 11461.33,1417.32 11461.33,6670.99 v1(11500.7,6710.36) 11540.07,6749.73 11540.07,9164.75 11561.01,9185.69 11561.01,9404.98 11520.47,9445.51 CN24.38@11520.47,9488.19
P14: CN20.36 CN21.36 CN22.36 CN23.36 CN24.36 CN25.36 SOM1.JX1-36 | length 36456.7
  Top Layer w8: CN20.36@351.18,6629.13 393.86,6629.13 434.39,6588.6 653.68,6588.6 667.33,6602.25 v1(3219.21,6602.25) v1(7405.04,6602.25) v1(11599.52,6602.25) 15169.07,6602.25 15180.56,6590.76 15328.02,6590.76 15368.55,6631.3 CN25.36@15411.23,6631.3 ; v1@3173.3,2879.13 3182.81,2888.64 5061.54,2888.64 5068.54,2881.63 5519.43,2881.63 5692.91,3055.12 SOM1.JX1-36@5692.91,3112.2 ; v1(11567.91,682.41) 11581.05,669.27 11581.05,549.03 11581.1,548.98 11581.1,511.81 11621.59,471.33 CN22.36@11621.59,469.42
  Top Layer w15: v1(3171.95,2879.13) v1@3173.3,2879.13
  Bottom Layer w8: v1(3171.95,2879.13) 3171.95,6554.99 v1(3219.21,6602.25) 3258.58,6641.62 3258.58,9163.57 3280.69,9185.69 3280.69,9404.98 3240.16,9445.51 CN23.36@3240.16,9488.19 ; v1(7405.04,6602.25) 7444.41,6641.62 7444.41,9163.57 7466.52,9185.69 7466.52,9404.98 7425.98,9445.51 CN21.36@7425.98,9488.19 ; v1(11567.91,682.41) 11567.35,682.96 11567.35,1417.32 11567.35,6570.08 v1(11599.52,6602.25) 11638.9,6641.62 11638.9,9163.57 11661.01,9185.69 11661.01,9404.98 11620.47,9445.51 CN24.36@11620.47,9488.19
P15: CN20.85 CN21.85 CN22.85 CN23.85 CN24.85 CN25.85 SOM1.JX1-38 | length 36127.3
  Top Layer w8: v1(676.34,6551.08) 14261.27,6551.08 14268.06,6557.88 15078.19,6557.88 15082.82,6553.24 v1(15086.07,6553.24) ; v1@3250.07,2857.13 3259.58,2866.63 5052.42,2866.63 5059.43,2859.63 5536.79,2859.63 5724.41,3047.24 SOM1.JX1-38@5724.41,3112.2 ; v1(3318.21,9163.03) 3318.21,9251.68 3298.82,9271.07 3298.82,9346.85 CN23.85@3340.16,9388.19 ; v1(7504.03,9163.03) 7504.03,9251.68 7484.65,9271.07 7484.65,9346.85 CN21.85@7525.98,9388.19 ; v1(11698.52,9163.03) 11698.52,9251.68 11679.13,9271.07 11679.13,9346.85 CN24.85@11720.47,9388.19
  Top Layer w15: v1(3248.72,2857.13) v1@3250.07,2857.13
  Bottom Layer w8: CN20.85@451.18,6529.13 492.52,6570.47 568.3,6570.47 587.69,6551.08 v1(676.34,6551.08) ; v1(3248.72,2857.13) 3248.72,2859.25 3240.16,2867.81 3240.16,6509.52 v1(3278.84,6548.2) 3318.21,6587.57 v1(3318.21,9163.03) ; v1(7464.66,6548.2) 7504.03,6587.57 v1(7504.03,9163.03) ; v1(11698.52,9163.03) 11698.52,6587.57 v1(11659.15,6548.2) 11625.32,6514.37 11625.32,635.08 11662.12,598.28 11662.12,471.56 11721.59,412.09 CN22.85@11721.59,369.42 ; v1(15086.07,6553.24) 15155.61,6553.24 15174.19,6571.83 15239.19,6571.83 15264.39,6546.63 15295.89,6546.63 CN25.85@15311.23,6531.3
P16: CN20.86 CN21.86 CN22.86 CN23.86 CN24.86 CN25.86 SOM1.JX1-37 | length 35000.9
  Top Layer w8: v1(710.21,6527.19) v1(3303.2,6527.19) v1(7489.03,6527.19) v1(11683.52,6527.19) 15207.13,6527.19 CN25.86@15211.23,6531.3 ; v1(3278.2,3531) 3796.23,3531 3928.12,3662.9 4230.15,3662.9 4355.03,3538.01 5517.11,3538.01 5722.37,3332.75 5722.37,3287.47 SOM1.JX1-37@5724.41,3285.43 ; v1(11646.33,678.55) 11646.33,675.3 11636.11,665.08 11636.11,664.13 11662.12,638.12 11662.12,328.88 CN22.86@11721.59,269.42
  Bottom Layer w8: CN20.86@551.18,6529.13 552.15,6528.16 709.24,6528.16 v1(710.21,6527.19) ; v1(3278.2,3531) 3278.2,6500.42 3303.2,6525.42 v1(3303.2,6527.19) 3342.57,6566.56 3342.57,9285.77 CN23.86@3340.16,9288.19 ; v1(7489.03,6527.19) 7528.4,6566.56 7528.4,9285.77 CN21.86@7525.98,9288.19 ; v1(11646.33,678.55) 11645.91,678.97 11645.91,6489.58 v1(11683.52,6527.19) 11722.89,6566.56 11722.89,9285.77 CN24.86@11720.47,9288.19
P17: CN20.34 CN21.34 CN22.34 CN23.34 CN24.34 CN25.34 SOM1.JX1-42 | length 36565.3
  Top Layer w8: CN20.34@351.18,6529.13 393.86,6529.13 435.19,6570.47 568.3,6570.47 632.59,6506.18 v1(3322.67,6506.18) v1(7508.5,6506.18) v1(11702.99,6506.18) 15020.93,6506.18 15027.72,6499.39 15042.19,6499.39 15050.83,6490.76 15328.02,6490.76 15368.55,6531.3 CN25.34@15411.23,6531.3 ; v1(3339.86,2835.12) 3341.04,2835.12 3350.55,2844.63 5043.3,2844.63 5050.31,2837.62 5573.84,2837.62 5787.4,3051.18 SOM1.JX1-42@5787.4,3112.2 ; v1(11672.92,683.3) 11672.92,677.4 11681.05,669.27 11681.05,549.03 11681.1,548.98 11681.1,511.81 11721.59,471.33 CN22.34@11721.59,469.42
  Bottom Layer w8: v1(3339.86,2835.12) 3307.09,2867.89 3307.09,6490.6 v1(3322.67,6506.18) 3362.04,6545.55 3362.04,9248.53 3380.69,9267.18 3380.69,9447.65 CN23.34@3340.16,9488.19 ; v1(7508.5,6506.18) 7547.87,6545.55 7547.87,9248.15 7566.52,9266.8 7566.52,9447.65 CN21.34@7525.98,9488.19 ; v1(11672.92,683.3) 11671.8,683.3 11667.12,687.99 11667.12,1417.32 11667.12,6470.31 v1(11702.99,6506.18) 11742.36,6545.55 11742.36,9247.53 11761.01,9266.18 11761.01,9447.65 CN24.34@11720.47,9488.19
P18: CN20.33 CN21.33 CN22.33 CN23.33 CN24.33 CN25.33 SOM1.JX1-41 | length 36242.7
  Top Layer w8: v1(728.35,6481.2) v1(3343.68,6481.2) v1(7529.51,6481.2) v1(11724,6481.2) 15030.68,6481.2 v1(15033.49,6478.39) ; CN23.33@3340.16,9588.19 3383.07,9545.28 3383.07,9264.54 3398.69,9248.93 3398.69,9235.05 3383.05,9219.42 v1(3383.05,9111.02) ; v1(3362.2,3614.17) 3848.27,3614.17 3919,3684.91 4239.26,3684.91 4364.15,3560.02 5560.31,3560.02 5787.4,3332.93 SOM1.JX1-41@5787.4,3285.43 ; CN21.33@7525.98,9588.19 7568.9,9545.28 7568.9,9264.54 7584.51,9248.93 7584.51,9235.05 7568.88,9219.42 v1(7568.88,9111.02) ; CN24.33@11720.47,9588.19 11763.39,9545.28 11763.39,9264.54 11779,9248.93 11779,9235.05 11763.37,9219.42 v1(11763.37,9111.02)
  Bottom Layer w8: CN20.33@251.18,6529.13 294.09,6486.22 574.83,6486.22 590.44,6470.61 604.32,6470.61 614.91,6481.2 v1(728.35,6481.2) ; v1(3362.2,3614.17) 3330.71,3645.67 3330.71,6468.23 3383.05,6520.57 v1(3383.05,9111.02) ; v1(7529.51,6481.2) 7568.88,6520.57 v1(7568.88,9111.02) ; CN22.33@11721.59,569.42 11721.59,572.82 11693.92,600.48 11693.92,6451.13 v1(11724,6481.2) 11763.37,6520.57 v1(11763.37,9111.02) ; v1(15033.49,6478.39) 15458.32,6478.39 CN25.33@15511.23,6531.3
P19: CN20.28 CN21.28 CN22.28 CN23.28 CN24.28 CN25.28 SOM1.JX1-44 | length 36934.5
  Top Layer w8: CN20.28@351.18,6229.13 393.86,6229.13 434.39,6188.6 653.68,6188.6 660.63,6195.54 v1(3631.31,6195.54) v1(7817.13,6195.54) v1(12011.62,6195.54) 15103.94,6195.54 15108.72,6190.76 15328.02,6190.76 15368.55,6231.3 CN25.28@15411.23,6231.3 ; v1(3391.04,2813.11) 3391.04,2816.36 3396.62,2821.93 3396.62,2822.65 3401.31,2827.33 5029.47,2827.33 5041.2,2815.61 5581.36,2815.61 5818.9,3053.15 SOM1.JX1-44@5818.9,3112.2
  Bottom Layer w8: v1(3391.04,2813.11) 3391.04,4212.82 3391.04,5950.1 3626.34,6185.4 3626.34,6187.33 3631.31,6192.3 v1(3631.31,6195.54) 3670.68,6234.91 3670.68,9175.67 3680.69,9185.69 3680.69,9404.98 3640.16,9445.51 CN23.28@3640.16,9488.19 ; v1(7817.13,6195.54) 7856.5,6234.91 7856.5,9175.67 7866.52,9185.69 7866.52,9404.98 7825.98,9445.51 CN21.28@7825.98,9488.19 ; CN24.28@12020.47,9488.19 12020.47,9445.51 12061.01,9404.98 12061.01,9185.69 12050.99,9175.67 12050.99,6234.91 v1(12011.62,6195.54) 11968.5,6152.42 11968.5,522.5 CN22.28@12021.59,469.42
P20: CN20.27 CN21.27 CN22.27 CN23.27 CN24.27 CN25.27 SOM1.JX1-43 | length 36546.5
  Top Layer w8: v1(727.5,6170.61) v1(3654.95,6170.61) v1(7840.77,6170.61) v1(12035.26,6170.61) 15032.75,6170.61 v1(15034.91,6172.77) ; v1(3421.26,3649.61) 3423.07,3647.8 3850.77,3647.8 3909.89,3706.91 4248.38,3706.91 4373.26,3582.03 5571.52,3582.03 5818.9,3334.65 SOM1.JX1-43@5818.9,3285.43 ; CN23.27@3640.16,9588.19 3680.73,9547.62 3694.32,9534.03 v1(3694.32,9107.53) ; CN21.27@7825.98,9588.19 7866.55,9547.62 7880.14,9534.03 v1(7880.14,9107.53) ; CN24.27@12020.47,9588.19 12061.04,9547.62 12074.63,9534.03 v1(12074.63,9107.53)
  Bottom Layer w8: CN20.27@251.18,6229.13 291.75,6188.56 309.71,6170.61 v1(727.5,6170.61) ; v1(3421.26,3649.61) 3421.26,5936.92 v1(3654.95,6170.61) 3694.32,6209.98 v1(3694.32,9107.53) ; v1(7840.77,6170.61) 7880.14,6209.98 v1(7880.14,9107.53) ; CN22.27@12021.59,569.42 12021.59,579.09 12000.83,599.84 12000.83,1417.11 12001.04,1417.32 12001.04,6136.39 v1(12035.26,6170.61) 12074.63,6209.98 v1(12074.63,9107.53) ; v1(15034.91,6172.77) 15133.02,6172.77 15141.36,6181.1 15461.04,6181.1 CN25.27@15511.23,6231.3
P21: CN20.26 CN21.26 CN22.26 CN23.26 CN24.26 CN25.26 SOM1.JX1-48 | length 36915.6
  Top Layer w8: CN20.26@351.18,6129.13 391.72,6169.67 601.98,6169.67 627.56,6144.1 v1(3697.7,6144.1) v1(7886.87,6144.1) v1(12081.72,6144.1) 14630.94,6144.1 14641.1,6154.26 15023.71,6154.26 15026.21,6151.76 15167.08,6151.76 15187.15,6171.83 15328.02,6171.83 15368.55,6131.3 CN25.26@15411.23,6131.3 ; v1@3567,2791.1 3576.51,2800.61 5025.07,2800.61 5032.08,2793.6 5610.79,2793.6 5881.89,3064.7 SOM1.JX1-48@5881.89,3112.2
  Top Layer w15: v1(3565.65,2791.1) v1@3567,2791.1
  Bottom Layer w8: v1(3565.65,2791.1) 3565.65,2792.64 3574.8,2801.79 3574.8,6021.2 v1(3697.7,6144.1) ; v1@3701.05,6144.1 3701.4,6144.1 3740.77,6183.47 3740.77,9136.81 3720.62,9156.96 3720.62,9216.39 3699.62,9237.39 3699.62,9447.65 CN23.26@3740.16,9488.19 ; v1(7886.87,6144.1) 7887.23,6144.1 7926.6,6183.47 7926.6,9136.81 7906.45,9156.96 7906.45,9216.39 7885.45,9237.39 7885.45,9447.65 CN21.26@7925.98,9488.19 ; CN24.26@12120.47,9488.19 12079.94,9447.65 12079.94,9237.39 12100.93,9216.39 12100.93,9156.96 12121.09,9136.81 12121.09,6183.47 v1(12081.72,6144.1) 12042.35,6104.73 12042.35,1417.32 12042.85,1416.82 12042.85,622.02 12069.71,595.17 12069.71,521.3 CN22.26@12121.59,469.42
P22: CN20.25 CN21.25 CN22.25 CN23.25 CN24.25 CN25.25 SOM1.JX1-47 | length 36449.5
  Top Layer w8: v1(727.5,6070.61) v1(3743.53,6070.61) v1(7929.36,6070.61) v1@12124.42,6070.61 ; v1(3614.17,3677.17) 3615.95,3675.39 3847.24,3675.39 3900.77,3728.92 4257.49,3728.92 4382.38,3604.04 5610.79,3604.04 5881.89,3332.93 SOM1.JX1-47@5881.89,3285.43 ; CN23.25@3740.16,9588.19 3782.9,9545.44 v1(3782.9,9199.81) ; CN21.25@7925.98,9588.19 7968.73,9545.44 v1(7968.73,9199.81) ; CN24.25@12120.47,9588.19 12163.22,9545.44 v1(12163.22,9199.81) ; v1(12124.42,6070.23) v1@12124.42,6070.61 ; v1(15034.91,6072.77) 15032.75,6070.61 v1@12124.42,6070.61
  Bottom Layer w8: CN20.25@251.18,6129.13 293.93,6086.39 711.72,6086.39 v1(727.5,6070.61) ; v1(3614.17,3677.17) 3615.5,3678.49 3615.5,4633.03 ; 3616.83,4633.03 3616.83,5943.9 v1(3743.53,6070.61) 3782.9,6109.98 v1(3782.9,9199.81) ; v1(7929.36,6070.61) 7968.73,6109.98 v1(7968.73,9199.81) ; CN22.25@12121.59,569.42 12080.91,610.09 12080.91,6027.67 12120.63,6067.39 12121.57,6067.39 v1(12124.42,6070.23) ; v1@12123.85,6070.61 12163.22,6109.98 v1(12163.22,9199.81) ; v1(15034.91,6072.77) 15052.9,6090.76 15428.02,6090.76 15429.62,6092.36 15472.29,6092.36 CN25.25@15511.23,6131.3
P23: CN20.75 CN21.75 CN22.75 CN23.75 CN24.75 CN25.75 SOM1.JX1-50 | length 36559.1
  Top Layer w8: v1(676.48,6047.72) v1(3772.36,6047.72) v1(7958.19,6047.72) v1(12152.68,6047.72) 15083.77,6047.72 v1(15085.93,6049.88) ; v1@3643.78,2769.09 3653.28,2778.6 5015.96,2778.6 5022.96,2771.59 5625.93,2771.59 5913.38,3059.05 SOM1.JX1-50@5913.38,3112.2 ; v1(3811.73,9159.56) 3811.73,9258.15 3798.82,9271.07 3798.82,9346.85 CN23.75@3840.16,9388.19 ; v1(7997.56,9159.56) 7997.56,9258.15 7984.65,9271.07 7984.65,9346.85 CN21.75@8025.98,9388.19 ; v1(12192.05,9159.56) 12192.05,9258.15 12179.13,9271.07 12179.13,9346.85 CN24.75@12220.47,9388.19
  Top Layer w15: v1(3642.42,2769.09) v1@3643.78,2769.09
  Bottom Layer w8: CN20.75@451.18,6029.13 492.52,6070.47 568.3,6070.47 591.05,6047.72 v1(676.48,6047.72) ; v1(3642.42,2769.09) 3653.54,2780.22 3653.54,5928.9 v1(3772.36,6047.72) 3811.73,6087.09 v1(3811.73,9159.56) ; v1(7958.19,6047.72) 7997.56,6087.09 v1(7997.56,9159.56) ; v1(12192.05,9159.56) 12192.05,6087.09 v1(12152.68,6047.72) 12130.96,6026.01 12130.96,663.74 12131.35,663.36 12131.35,629.06 12165.35,595.05 12165.35,439.14 12221.59,382.91 CN22.75@12221.59,369.42 ; v1(15085.93,6049.88) 15124.69,6049.88 15147.44,6072.63 15269.89,6072.63 CN25.75@15311.23,6031.3
P24: CN20.76 CN21.76 CN22.76 CN23.76 CN24.76 CN25.76 SOM1.JX1-49 | length 35140.5
  Top Layer w8: CN20.76@551.18,6029.13 555.98,6024.33 v1(3803.21,6024.33) v1(7989.03,6024.33) v1(12183.52,6024.33) 15138.51,6024.33 15146.91,6032.73 15209.79,6032.73 CN25.76@15211.23,6031.3 ; v1(3687.99,3713.57) 3854.3,3713.57 3891.66,3750.93 4266.61,3750.93 4391.5,3626.04 5635.77,3626.04 5913.39,3348.43 SOM1.JX1-49@5913.39,3285.43 ; v1(12152.36,660.33) 12152.36,657.08 12162.12,647.31 12162.12,328.88 CN22.76@12221.59,269.42
  Bottom Layer w8: v1(3687.99,3713.57) 3687.99,5909.12 v1(3803.21,6024.33) 3842.58,6063.7 3842.58,9285.77 CN23.76@3840.16,9288.19 ; v1(7989.03,6024.33) 8028.4,6063.7 8028.4,9285.77 CN21.76@8025.98,9288.19 ; v1(12152.36,660.33) 12152.36,663.58 12145.97,669.96 12145.97,5986.78 v1(12183.52,6024.33) 12222.89,6063.7 12222.89,9285.77 CN24.76@12220.47,9288.19
P25: CN20.24 CN21.24 CN22.24 CN23.24 CN24.24 CN25.24 SOM1.JX1-54 | length 36992.4
  Top Layer w8: CN20.24@351.18,6029.13 393.86,6029.13 434.39,5988.6 653.68,5988.6 664.58,5999.49 v1(3819.61,5999.49) v1(8005.44,5999.49) v1(12199.93,5999.49) 14842.52,5999.49 14848.23,5993.78 15105.71,5993.78 15115.23,5984.25 15321.51,5984.25 15368.55,6031.3 CN25.24@15411.23,6031.3 ; v1@3734.92,2747.09 3744.42,2756.59 5006.84,2756.59 5013.85,2749.59 5661.26,2749.59 5976.38,3064.7 SOM1.JX1-54@5976.38,3112.2 ; v1(12166.98,683.85) 12166.98,683.34 12181.05,669.27 12181.05,549.03 12181.1,548.98 12181.1,511.81 12221.59,471.33 CN22.24@12221.59,469.42
  Top Layer w15: v1(3733.56,2747.09) v1@3734.91,2747.09
  Bottom Layer w8: v1(3733.56,2747.09) 3733.56,2748.62 3720.47,2761.71 3720.47,5900.35 v1(3819.61,5999.49) 3858.98,6038.86 3858.98,9163.97 3880.69,9185.69 3880.69,9404.98 3840.16,9445.51 CN23.24@3840.16,9488.19 ; v1(8005.44,5999.49) 8044.81,6038.86 8044.81,9163.97 8066.52,9185.69 8066.52,9404.98 8025.98,9445.51 CN21.24@8025.98,9488.19 ; v1(12166.98,683.85) 12166.98,5966.54 v1(12199.93,5999.49) 12239.3,6038.86 12239.3,9163.97 12261.01,9185.69 12261.01,9404.98 12220.47,9445.51 CN24.24@12220.47,9488.19
P26: CN20.23 CN21.23 CN22.23 CN23.23 CN24.23 CN25.23 SOM1.JX1-53 | length 36464.6
  Top Layer w8: v1(727.5,5970.61) v1(3841.9,5970.61) v1(8027.72,5970.61) v1(12222.21,5970.61) 15032.75,5970.61 v1(15034.91,5972.77) ; v1(3751.97,3744.09) 3849.73,3744.09 3878.57,3772.94 4275.73,3772.94 4400.61,3648.05 5661.26,3648.05 5976.38,3332.93 SOM1.JX1-53@5976.38,3285.43 ; CN23.23@3840.16,9588.19 3883.07,9545.28 3883.07,9264.54 3898.69,9248.93 3898.69,9111.87 3881.27,9094.46 v1(3881.27,9038.35) ; CN21.23@8025.98,9588.19 8068.9,9545.28 8068.9,9264.54 8084.51,9248.93 8084.51,9111.87 8067.09,9094.46 v1(8067.09,9038.35) ; CN24.23@12220.47,9588.19 12263.39,9545.28 12263.39,9264.54 12279,9248.93 12279,9111.87 12261.58,9094.46 v1(12261.58,9038.35)
  Bottom Layer w8: CN20.23@251.18,6029.13 294.09,5986.22 574.83,5986.22 590.44,5970.61 v1(727.5,5970.61) ; v1(3751.97,3744.09) 3751.97,5880.68 3881.27,6009.98 v1(3881.27,9038.35) ; v1(8027.72,5970.61) 8067.09,6009.98 v1(8067.09,9038.35) ; CN22.23@12221.59,569.42 12187.99,603.02 12187.99,5936.38 v1(12222.21,5970.61) 12261.58,6009.98 v1(12261.58,9038.35) ; v1(15034.91,5972.77) 15136.15,5972.77 15151.77,5988.38 15468.31,5988.38 CN25.23@15511.23,6031.3
P27: CN20.73 CN21.73 CN22.73 CN23.73 CN24.73 CN25.73 SOM1.JX1-56 | length 36690.5
  Top Layer w8: v1(676.67,5949.03) v1(3880.89,5949.03) v1(8066.72,5949.03) v1(12261.2,5949.03) 15083.58,5949.03 v1(15085.74,5951.19) ; v1@3786.1,2725.08 3788.39,2727.37 3795.23,2727.37 3795.43,2727.58 4235.45,2727.58 4242.46,2734.59 4997.72,2734.59 5004.73,2727.58 5680.33,2727.58 6007.87,3055.12 SOM1.JX1-56@6007.87,3112.2 ; v1(3920.26,9162.7) 3920.26,9249.62 3898.82,9271.07 3898.82,9346.85 CN23.73@3940.16,9388.19 ; v1(8106.09,9162.7) 8106.09,9249.62 8084.65,9271.07 8084.65,9346.85 CN21.73@8125.98,9388.19 ; v1(12300.58,9162.7) 12300.58,9249.62 12279.13,9271.07 12279.13,9346.85 CN24.73@12320.47,9388.19
  Top Layer w15: v1(3784.74,2725.08) v1@3786.1,2725.08
  Bottom Layer w8: CN20.73@451.18,5929.13 492.52,5970.47 568.3,5970.47 589.75,5949.03 v1(676.67,5949.03) ; v1(3784.74,2725.08) 3784.74,5852.88 v1(3880.89,5949.03) 3920.26,5988.4 v1(3920.26,9162.7) ; v1(8066.72,5949.03) 8106.09,5988.4 v1(8106.09,9162.7) ; v1(12300.58,9162.7) 12300.57,5988.4 v1(12261.2,5949.03) 12222.52,5910.34 12222.52,689.56 12210.5,677.55 12210.5,649.9 12273.35,587.06 12273.35,417.66 CN22.73@12321.59,369.42 ; v1(15085.74,5951.19) 15153.95,5951.19 15175.39,5972.63 15269.89,5972.63 CN25.73@15311.23,5931.3
P28: CN20.74 CN21.74 CN22.74 CN23.74 CN24.74 CN25.74 SOM1.JX1-55 | length 35114.2
  Top Layer w8: CN20.74@551.18,5929.13 556.03,5924.28 v1(3901.9,5924.28) v1(8087.72,5924.28) v1(12282.21,5924.28) 15088.54,5924.28 15097.59,5933.33 15209.2,5933.33 CN25.74@15211.23,5931.3 ; v1(3816.28,3794.95) 4284.84,3794.95 4409.73,3670.06 5680.33,3670.06 6007.87,3342.52 SOM1.JX1-55@6007.87,3285.43 ; v1@12236.11,673.45 12236.11,664.13 12262.12,638.12 12262.12,328.88 CN22.74@12321.59,269.42
  Bottom Layer w8: v1(3816.28,3794.95) 3816.28,5838.67 v1(3901.9,5924.28) 3941.27,5963.65 CN23.74@3941.27,9287.08 ; v1(8087.72,5924.28) 8127.09,5963.65 CN21.74@8127.09,9287.08 ; v1(12236.14,673.48) 12237.52,674.86 12237.52,5879.59 v1(12282.21,5924.28) 12321.58,5963.65 CN24.74@12321.58,9287.08
P29: CN20.22 CN21.22 CN22.22 CN23.22 CN24.22 CN25.22 SOM1.JX1-62 | length 36872.8
  Top Layer w8: CN20.22@351.18,5929.13 393.86,5929.13 434.39,5888.6 653.68,5888.6 664.58,5899.49 v1(3917.99,5899.49) v1(8103.82,5899.49) v1(12298.31,5899.49) 15099.99,5899.49 15108.72,5890.76 15328.02,5890.76 15368.55,5931.3 CN25.22@15411.23,5931.3 ; v1@4284.23,2703.07 4286.53,2705.37 4293.36,2705.37 4293.56,2705.57 4319.74,2705.57 4326.75,2712.58 4988.61,2712.58 4995.62,2705.57 5766.59,2705.57 6102.36,3041.34 SOM1.JX1-62@6102.36,3112.2 ; v1(12261.63,682.41) 12267.91,682.41 12281.05,669.27 12281.05,549.03 12281.1,548.98 12281.1,511.81 12321.59,471.33 CN22.22@12321.59,469.42
  Top Layer w15: v1(4282.88,2703.07) v1@4284.23,2703.07
  Bottom Layer w8: CN23.22@3940.16,9488.19 3940.16,9445.51 3980.69,9404.98 3980.69,9185.69 3957.36,9162.35 3957.36,5938.86 v1(3917.99,5899.49) 3897.64,5879.14 3897.64,4807.09 3968.5,4736.22 3968.5,3795.7 4282.88,3481.33 v1(4282.88,2703.07) ; v1(8103.82,5899.49) 8143.19,5938.86 8143.19,9162.35 8166.52,9185.69 8166.52,9404.98 8125.98,9445.51 CN21.22@8125.98,9488.19 ; v1(12261.63,682.41) 12259.34,684.7 12259.34,692.69 12258.94,693.09 12258.94,1417.32 12258.94,5860.12 v1(12298.31,5899.49) 12337.68,5938.86 12337.68,9162.35 12361.01,9185.69 12361.01,9404.98 12320.47,9445.51 CN24.22@12320.47,9488.19
P30: CN20.21 CN21.21 CN22.21 CN23.21 CN24.21 CN25.21 SOM1.JX1-61 | length 36347
  Top Layer w8: v1(727.5,5870.61) 728.56,5871.67 v1(3941.7,5871.67) v1(8127.52,5871.67) v1(12322.01,5871.67) 15033.91,5871.67 v1(15034.91,5872.67) ; CN23.21@3940.16,9588.19 3983.07,9545.28 3983.07,9264.54 3998.48,9249.13 3998.48,9140.27 3981.07,9122.85 v1(3981.07,9066.75) ; v1(4010.53,3857.05) 4050.63,3816.95 4293.96,3816.95 4418.84,3692.07 5743.23,3692.07 6102.36,3332.93 SOM1.JX1-61@6102.36,3285.43 ; CN21.21@8125.98,9588.19 8168.9,9545.28 8168.9,9264.54 8184.31,9249.13 8184.31,9140.27 8166.89,9122.85 v1(8166.89,9066.75) ; CN24.21@12320.47,9588.19 12363.39,9545.28 12363.39,9264.54 12378.8,9249.13 12378.8,9140.27 12361.38,9122.85 v1(12361.38,9066.75)
  Bottom Layer w8: CN20.21@251.18,5929.13 294.09,5886.22 574.83,5886.22 590.24,5870.81 727.3,5870.81 v1(727.5,5870.61) ; v1(3981.07,9066.75) 3981.07,5911.04 3928.79,5858.76 3928.79,4811.36 4010.53,4729.62 v1(4010.53,3857.05) ; v1(8127.52,5871.67) 8166.89,5911.04 v1(8166.89,9066.75) ; CN22.21@12321.59,569.42 12282.64,608.36 12282.64,1417.32 12282.64,5832.3 v1(12322.01,5871.67) 12361.38,5911.04 v1(12361.38,9066.75) ; v1(15034.91,5872.67) 15171.87,5872.67 15187.58,5888.38 15468.31,5888.38 CN25.21@15511.23,5931.3
P31: CN20.71 CN21.71 CN22.71 CN23.71 CN24.71 CN25.71 SOM1.JX1-64 | length 36554.5
  Top Layer w8: v1(676.5,5849.8) 676.69,5849.6 736.2,5849.6 736.4,5849.8 v1(3980.13,5849.8) v1(8165.95,5849.8) v1(12360.44,5849.8) 15084.05,5849.8 v1(15085.91,5851.66) ; v1@4019.69,9162.68 v1(4019.5,9162.87) 4019.5,9250.39 3998.82,9271.07 3998.82,9346.85 CN23.71@4040.16,9388.19 ; v1(4359.65,2681.06) 4405.47,2681.06 4414.98,2690.57 4979.49,2690.57 4986.5,2683.56 5783.96,2683.56 6133.86,3033.46 SOM1.JX1-64@6133.86,3112.2 ; v1@8205.52,9162.68 v1(8205.32,9162.87) 8205.32,9250.39 8184.65,9271.07 8184.65,9346.85 CN21.71@8225.98,9388.19 ; v1@12400.01,9162.68 v1(12399.81,9162.87) 12399.81,9250.39 12379.13,9271.07 12379.13,9346.85 CN24.71@12420.47,9388.19
  Bottom Layer w8: CN20.71@451.18,5829.13 492.52,5870.47 568.3,5870.47 588.98,5849.8 v1(676.5,5849.8) ; v1(4019.5,9162.87) 4019.5,5889.17 v1(3980.13,5849.8) 3953.24,5822.91 3953.24,4826.28 4055.12,4724.41 4055.12,3817.66 4359.65,3513.13 v1(4359.65,2681.06) ; v1(8165.95,5849.8) 8205.32,5889.17 v1(8205.32,9162.87) ; v1(12399.81,9162.87) 12399.81,5889.17 v1(12360.44,5849.8) 12322.04,5811.39 12322.04,695.11 12310.5,683.57 12310.5,649.9 12373.35,587.06 12373.35,417.66 CN22.71@12421.59,369.42 ; v1(15085.91,5851.66) 15086.21,5851.96 15173.43,5851.96 15194.11,5872.63 15269.89,5872.63 CN25.71@15311.23,5831.3